# Allegro board STLINKV3_PINOUT_V10A.brd
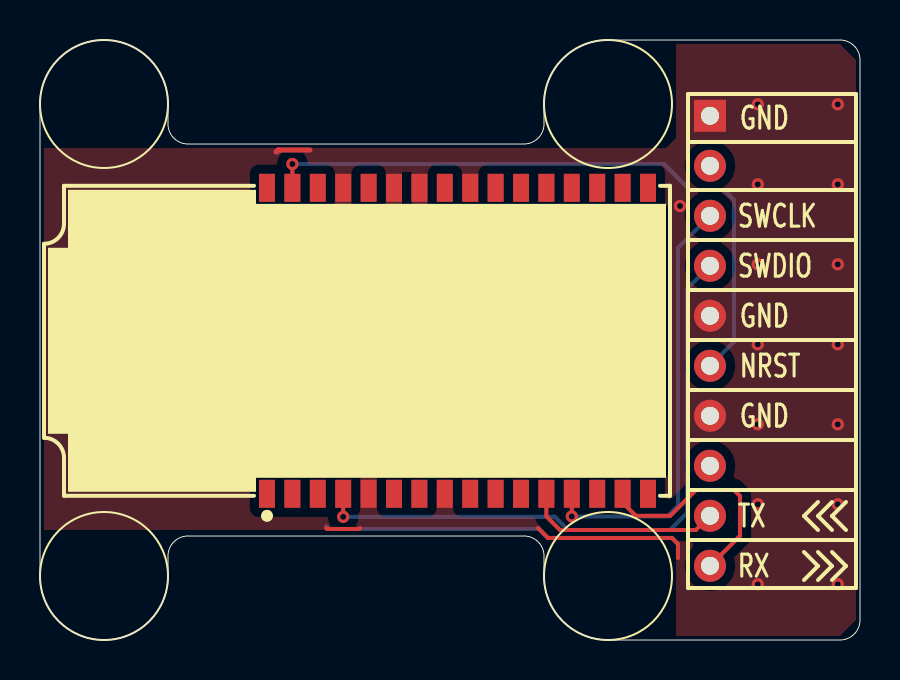
[diagram p0: board, top side]
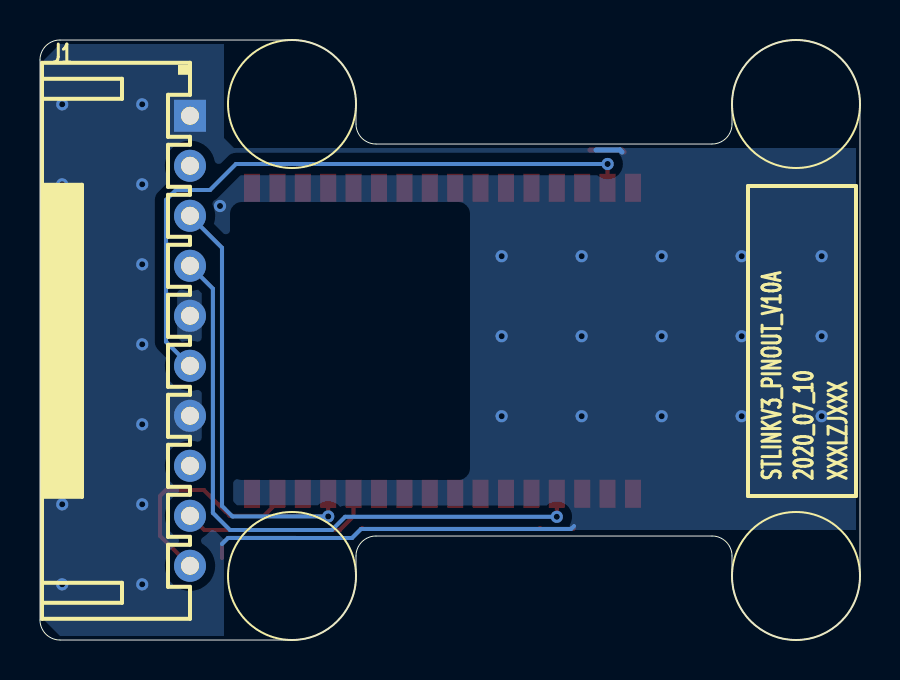
[diagram p1: board, bottom side, seen from below]

Outline 41 x 30 mm; copper layers: TOP, BOTTOM. Coordinates in mm from the lower left corner of the outline.
Outline path: 0,26.8 0,3.2 arc(0.94,0.94) 3.2,0 arc(5.46,0.94) 6.4,3.2 6.4,4.2 arc(6.69,4.91) 7.4,5.2 24.2,5.2 arc(24.91,4.91) 25.2,4.2 25.2,3.2 arc(26.14,0.94) 28.4,0 40,0 arc(40.71,0.29) 41,1 41,29 arc(40.71,29.71) 40,30 28.4,30 arc(26.14,29.06) 25.2,26.8 25.2,25.8 arc(24.91,25.09) 24.2,24.8 7.4,24.8 arc(6.69,25.09) 6.4,25.8 6.4,26.8 arc(5.46,29.06) 3.2,30 arc(0.94,29.06) 0,26.8

## Design rules (mm)
constraint set DEFAULT: min track width 0.203, pair gap 0.203

## Placement (name value [footprint] x y rotation side)
J1  -  [HX25035-10WA]  33.5 14.96 270 bottom
NOREF  -  []  0 0 0 top
NOREF#2  -  []  0 0 90 top
U1  -  [STLINK-V3MODS]  31.4 14.96 90 top

## Library data of the parts
J1 = CONN RCPT 10
U1 = STLINK-V3MODS

## Footprints (pads in the part's own frame, mm; a bottom-side part is the same pattern mirrored in y, then rotated)
HX25035-10WA
  rect 1.6x1.6 hole 0.9: 1(-11.25,0)
  round 1.6 hole 0.9: 2(-8.75,0) 3(-6.25,0) 4(-3.75,0) 5(-1.25,0) 6(1.25,0) 7(3.75,0) 8(6.25,0) 9(8.75,0) 10(11.25,0)
STLINK-V3MODS
  rect 1.4x0.8 smd: 1(-7.65,20.05) 2(-7.65,18.78) 3(-7.65,17.51) 4(-7.65,16.24) 5(-7.65,14.97) 6(-7.65,13.7) 7(-7.65,12.43) 8(-7.65,11.16) 9(-7.65,9.89) 10(-7.65,8.62) 11(-7.65,7.35) 12(-7.65,6.08) 13(-7.65,4.81) 14(-7.65,3.54) 15(-7.65,2.27) 16(-7.65,1) 17(7.65,1) 18(7.65,2.27) 19(7.65,3.54) 20(7.65,4.81) 21(7.65,6.08) 22(7.65,7.35) 23(7.65,8.62) 24(7.65,9.89) 25(7.65,11.16) 26(7.65,12.43) 27(7.65,13.7) 28(7.65,14.97) 29(7.65,16.24) 30(7.65,17.51) 31(7.65,18.78) 32(7.65,20.05)

## Nets
GND: J1.1 J1.5 J1.7 U1.5 U1.8 U1.24 U1.26 U1.27 U1.29
T_NRST: J1.6 U1.31
T_SWCLK: J1.3 U1.13
T_SWDIO: J1.4 U1.4
T_VCP_RX: J1.10 U1.15
T_VCP_TX: J1.9 U1.12

Pads without a net: J1 2 8; U1 1 2 3 6 7 9 10 11 14 16 17 18 19 20 21 22 23 25 28 30 32

## Via types
v1: diameter 0.61, hole 0.305, TOP to BOTTOM, 33 vias

## Routing (per net, layer and track width the routed paths; a pad name or vN(x,y) marks a point on that pad's centre or on a via; arc(x,y) is an arc through that point)
GND: length 30.8
  TOP w0.203: 24.9,5.6 25.4,5.1 31.6,5.1 31.9,4.8 31.9,4.1 ; 14.3,5.6 14.35,5.55 15.95,5.55 16,5.6
  TOP w0.254: 13.5,24.5 11.9,24.5 11.8,24.4
  BOTTOM w0.203: 31.9,4.8 31.6,5.1 31.59,5.1 28.21,5.1 28.2,5.1 25.4,5.1 24.95,5.55 14.45,5.55 14.3,5.7
  BOTTOM w0.254: 13.2,24.5 12,24.5 11.9,24.4
  vias: v1(1.92,19.19) v1(1.92,15.19) v1(1.92,11.19) v1(5.92,19.19) v1(5.92,15.19) v1(5.92,11.19) v1(9.92,19.19) v1(9.92,15.19) v1(9.92,11.19) v1(13.92,19.19) v1(13.92,15.19) v1(13.92,11.19) v1(17.92,19.19) v1(17.92,15.19) v1(17.92,11.19) v1(32,21.7) v1(35.89,26.78) v1(35.89,22.78) v1(35.89,18.78) v1(35.89,14.78) v1(35.89,10.78) v1(35.89,6.78) v1(35.89,2.78) v1(39.89,26.78) v1(39.89,22.78) v1(39.89,18.78) v1(39.89,14.78) v1(39.89,10.78) v1(39.89,6.78) v1(39.89,2.78)
T_NRST: length 32.8
  TOP w0.203: U1.31 v1(12.62,23.8)
  BOTTOM w0.203: J1.6 34.7,14.91 34.7,22 34.2,22.5 32.5,22.5 31.2,23.8 v1(12.62,23.8)
T_SWCLK: length 21.8
  TOP w0.203: U1.13 v1(26.59,6.18)
  BOTTOM w0.203: J1.3 31.9,19.61 31.9,6.7 31.38,6.18 v1(26.59,6.18)
T_SWDIO: length 31.8
  TOP w0.203: U1.4 v1(15.16,6.16)
  BOTTOM w0.203: v1(15.16,6.16) 25.74,6.16 26.4,5.5 31.5,5.5 32.36,6.36 32.36,17.57 J1.4
T_VCP_RX: length 11.4
  TOP w0.203: U1.15 29.13,6.87 29.79,6.21 31.51,6.21 32.8,7.5 34.7,7.5 35,7.2 35,5.21 J1.10
T_VCP_TX: length 9.9
  TOP w0.203: U1.12 25.32,6.18 26,5.5 32.79,5.5 J1.9

## Copper pours and planes (outline as drawn; the poured copper is in the pictures)
GND on TOP: 0.2,24.6 31.3,24.6 31.8,25.1 31.8,29.8 40,29.8 40.8,29 40.8,1 40,0.2 31.8,0.2 31.8,5 31.3,5.5 0.2,5.5 ; 1 cut-out
GND on BOTTOM: 0.2,24.6 31.3,24.6 31.8,25.1 31.8,29.8 40,29.8 40.8,29 40.8,1 40,0.2 31.8,0.2 31.8,5 31.3,5.5 0.2,5.5

## Text on the board
Ref Des/Silkscreen Bottom: XXXLZJXXX | 2020_07_10 | STLINKV3_PINOUT_V10A
Ref Des/Silkscreen Top: SWCLK | SWDIO | TX | RX | GND | NRST
DIMENSION: FIGURE | FINISHED_SIZE | 0.3048 | 0.9 | DRILL CHART: TOP to BOTTOM | ALL UNITS ARE IN MILLIMETERS | PLATED | QTY | 33 | 10 | 43 | TOTAL HOLES:
